# Altium PCB One_Digit_7_Seg_Display.PcbDoc
Units mm, origin at the board's own origin, x right, y up, seen from the top; angles counter-clockwise.
Board outline 46.61 x 34.29 mm, 2 copper layers (Top Layer, Bottom Layer); 21 components, 25 nets, 115 pads, 45 vias.
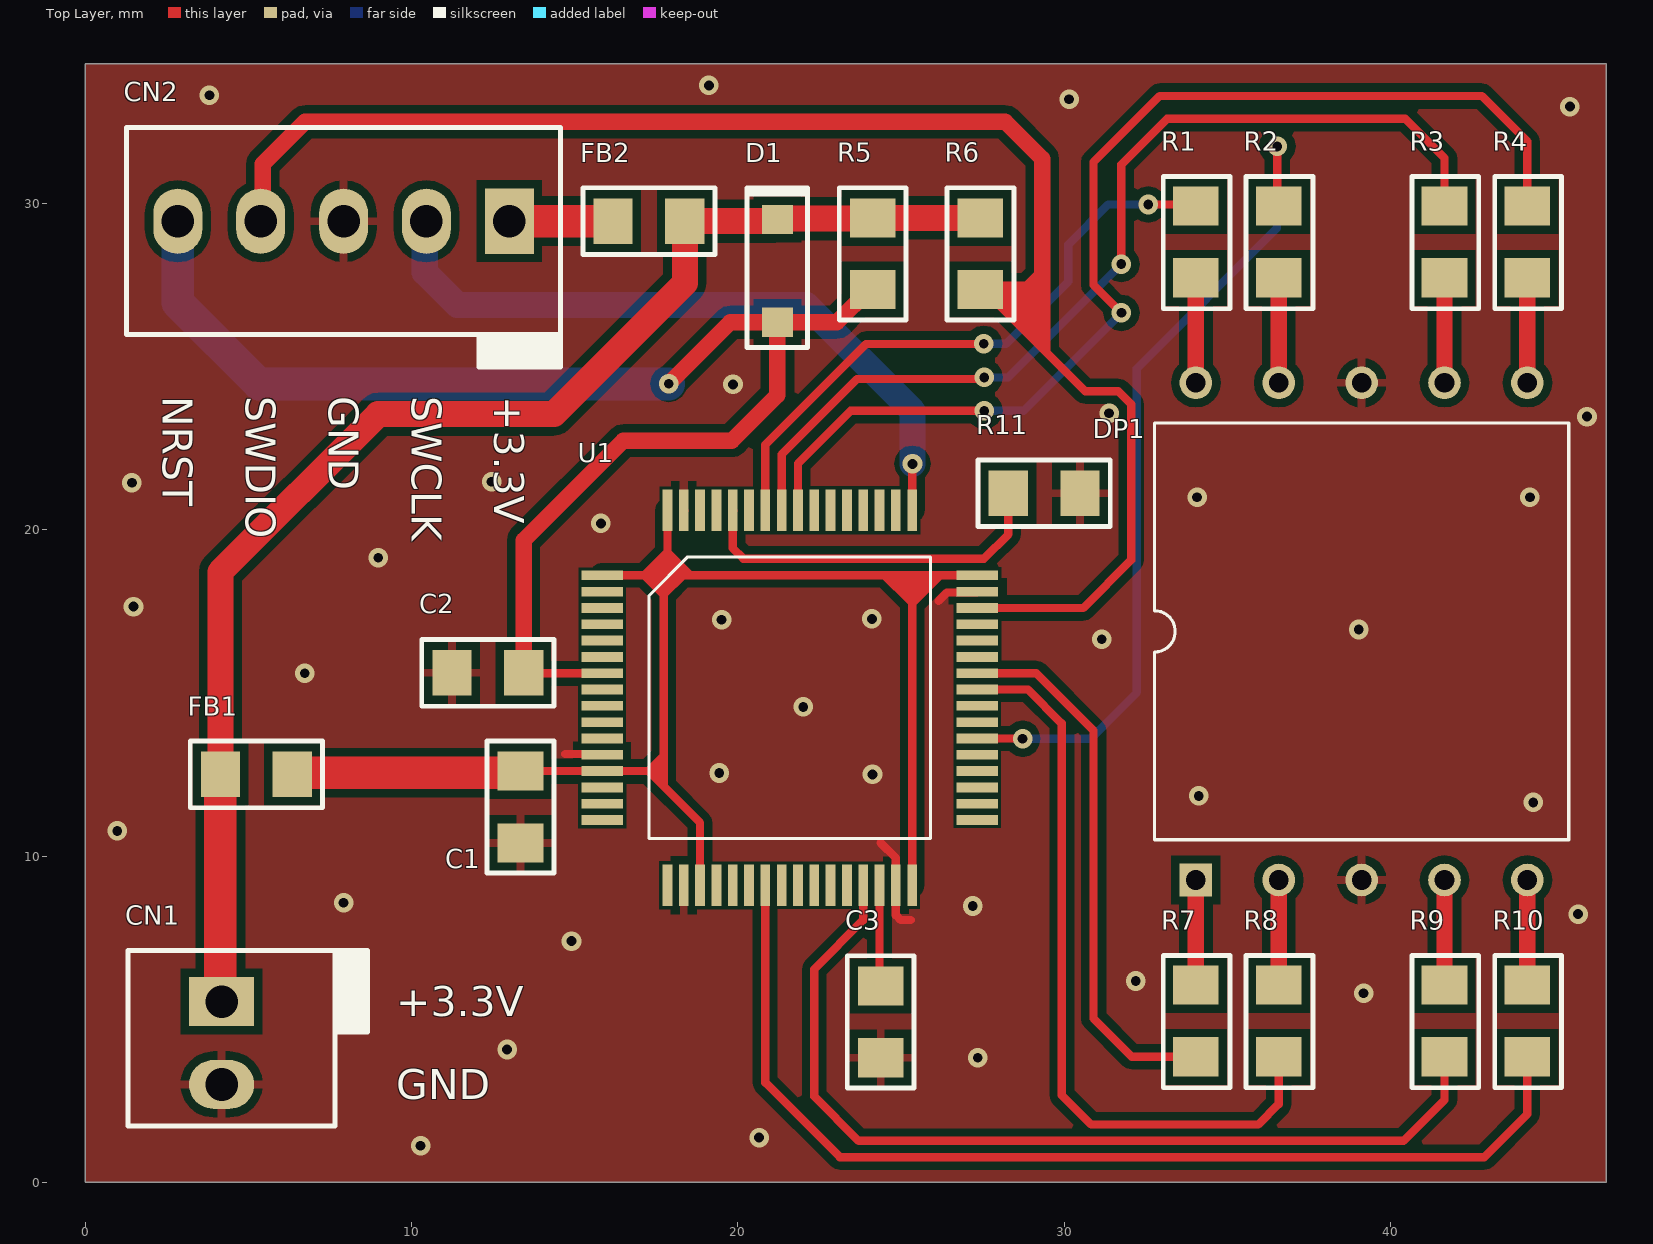
[diagram p0: Top Layer view]
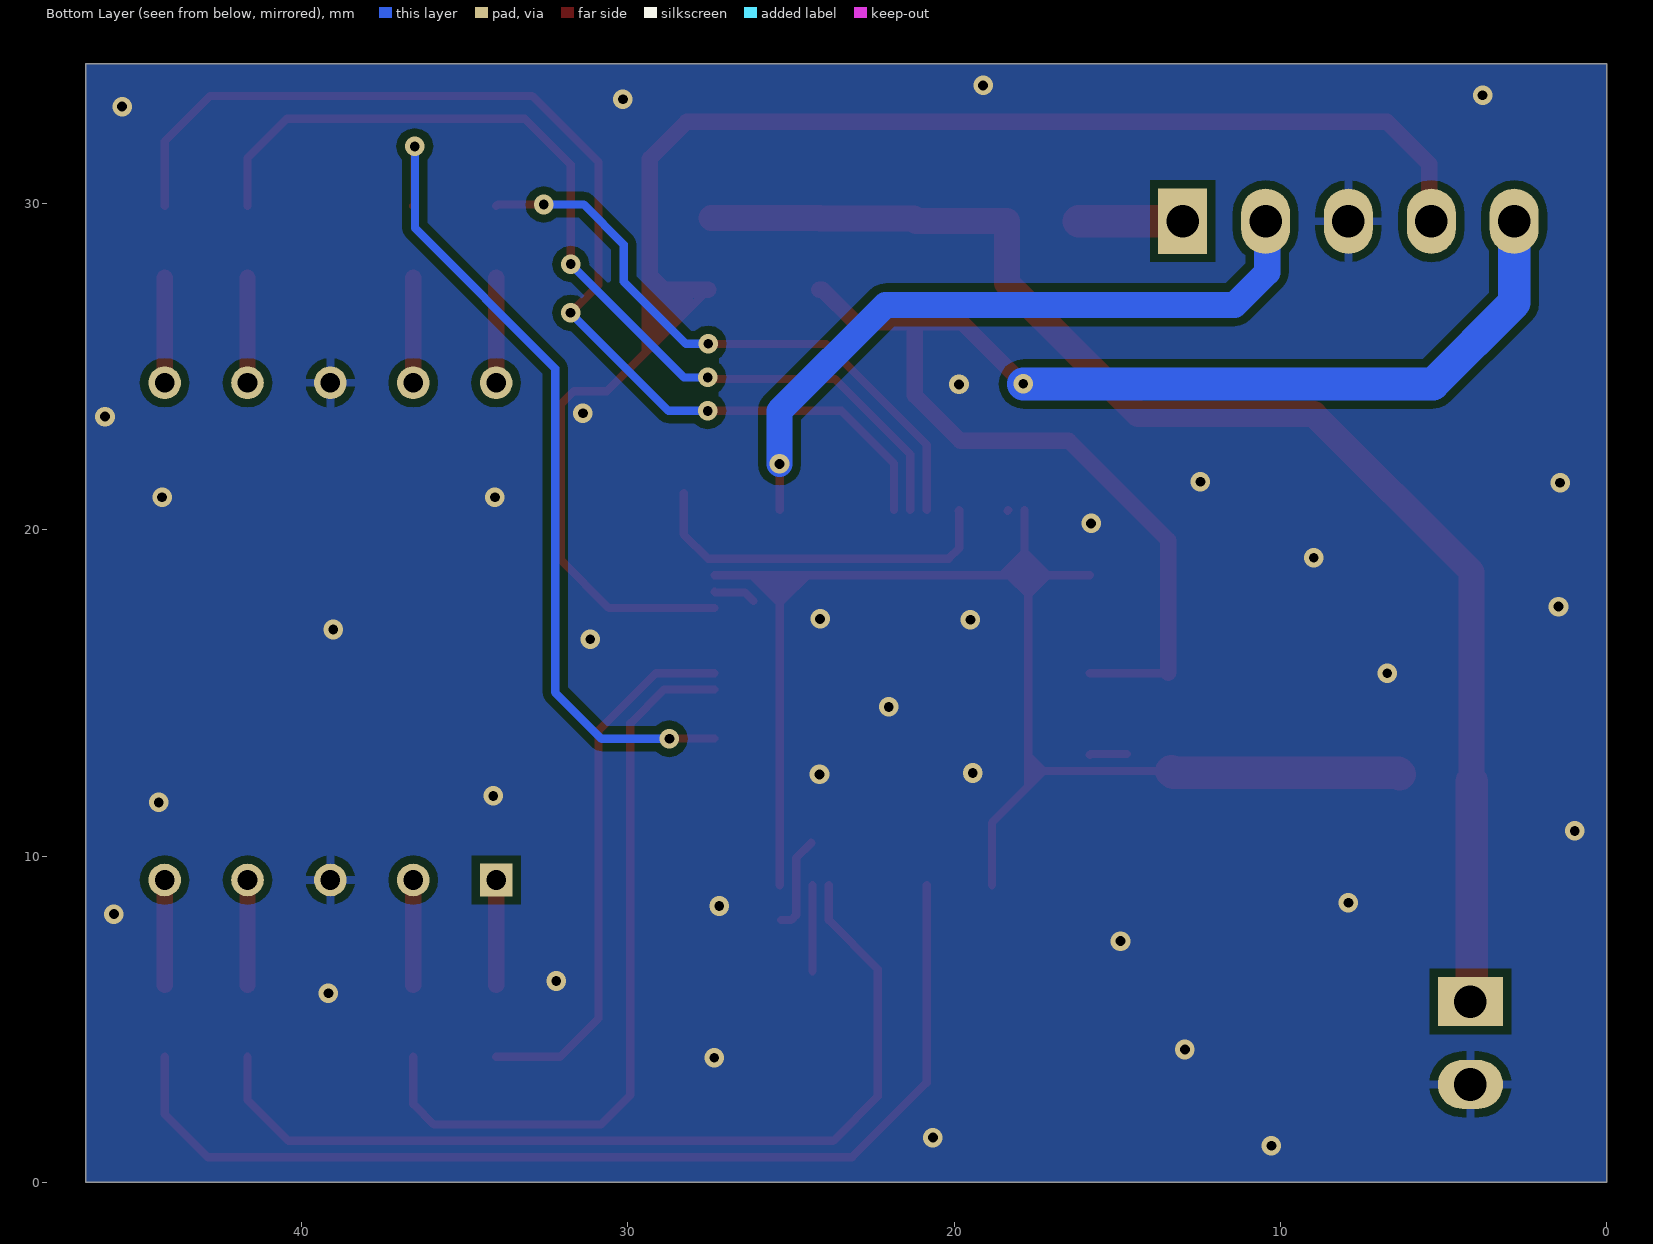
[diagram p1: Bottom Layer view, seen from below]
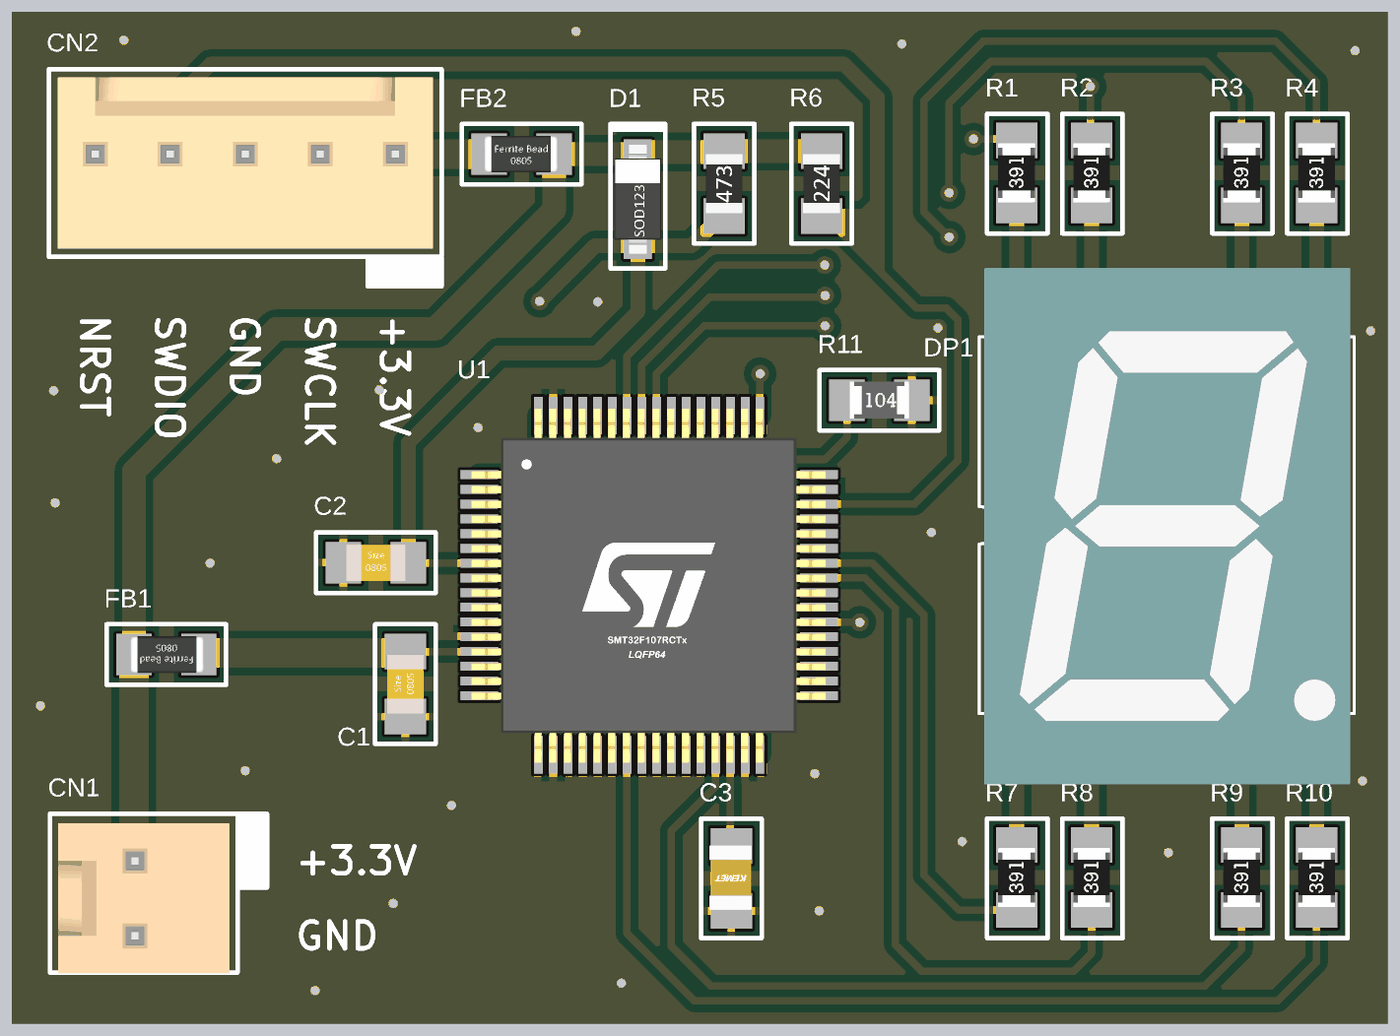
[diagram p2: 3D render of the assembled board from above, using the file's embedded part models]

## Layer stack, top to bottom
Top Solder: solder mask 0.0102, Solder Resist, Dk 3.5
Top Layer: signal copper 0.0356
Dielectric 1: dielectric 0.32, FR-4, Dk 4.8
Bottom Layer: signal copper 0.0356
Bottom Solder: solder mask 0.0102, Solder Resist, Dk 3.5

## Board outline
0,0 0,34.29 46.609,34.29 46.609,0

## Design rules (kind name [scope] priority, off if disabled: settings)
Clearance Clearance_U1 [InComponent('U1')] p1: gap=0.1 ignorepadtopadclearanceinfootprint=FALSE
Clearance [All] p2: gap=0.25 ignorepadtopadclearanceinfootprint=FALSE except(0.2: Arc-Arc Arc-Track Track-Track)
MinimumSolderMaskSliver [All] p1: minsoldermaskwidth=0.1
PlaneConnect [All] p1: planeconnectstyle=Direct reliefexpansion=0.508 reliefentries=4 reliefconductorwidth=0.254 reliefairgap=0.254
PolygonConnect "Connect Via to GND" [(ObjectKind = 'Via') And (Net ='GND')] p1: connectstyle=Direct reliefconductorwidth=0.254 reliefentries=4 polygonreliefangle="90 Angle" airgapwidth=0.254
PolygonConnect [All] p2: connectstyle=Relief reliefconductorwidth=0.254 reliefentries=4 polygonreliefangle="90 Angle" airgapwidth=0.254
RoutingVias [All] p1: holewidth=0.3 width=0.7 viastyle="Through Hole" minholewidth=0.3 minwidth=0.7 maxholewidth=0.3 maxwidth=0.7
SilkToSolderMaskClearance [IsPad] p1: minsilkscreentomaskgap=0.2 clearancetoexposedcopper=TRUE
SolderMaskExpansion [All] p1: expansion=0.102
Width [All] p1: maxlimit=1 minlimit=0.254 preferedwidth=0.3
27 further rules are at their usual default settings.

## Components (designator, comment, footprint, x,y, rotation, side; value= is the part's Value field where it differs from the comment)
C1 "100uF/50V" "CAPACITOR 0805" 13.335,11.509 r90 top
C2 "10nF/50V" "CAPACITOR 0805" 12.335,15.621 r0 top
C3 "4.7uF/16V" "CAPACITOR 0805 4.7UF" 24.375,4.925 r90 top
CN1 "PCMC2-02 - Alimentação +3V3" "HEADER MALE HORIZONTAL 2X1" 4.175,4.275 r90 top
CN2 "PCMC2-05 - Gravacao STM32" "HEADER MACHO HORIZONTAL 5X1 - GRAVACAO STM32" 7.913,29.464 r0 top
D1 "1N4148W-TP" SOD123 21.209,27.94 r90 top
DP1 "TDSG5160" TDSG5160 31.111,22.871 r0 top
FB1 "1A" "FERRITE 0805" 5.238,12.509 r180 top
FB2 "1A" "FERRITE 0805" 17.272,29.465 r0 top
R1 "390R" "RESISTOR 0805 390R" 34.036,28.829 r90 top
R2 "390R" "RESISTOR 0805 390R" 36.576,28.829 r90 top
R3 "390R" "RESISTOR 0805 390R" 41.656,28.829 r90 top
R4 "390R" "RESISTOR 0805 390R" 44.196,28.829 r90 top
R5 "47K" "RESISTOR 0805 47K" 24.13,28.465 r90 top
R6 "220k" "RESISTOR 0805 220K" 27.432,28.465 r90 top
R7 "390R" "RESISTOR 0805 390R" 34.036,4.953 r90 top
R8 "390R" "RESISTOR 0805 390R" 36.576,4.953 r90 top
R9 "390R" "RESISTOR 0805 390R" 41.656,4.953 r90 top
R10 "390R" "RESISTOR 0805 390R" 44.196,4.953 r90 top
R11 "100k" "RESISTOR 0805 100K" 29.413,21.125 r0 top
U1 "STM32F411RET6" LQFP64 21.59,14.859 r0 top

## Footprints (in the part's own frame and the unit in brackets; to place one, negate y for a bottom-side part, rotate by r counter-clockwise, add the part's x,y. Pads: shape width x height; smd on the part's side, far side on the other; paste and mask are expansions set on the pad)
"CAPACITOR 0805" [mm]
  rect 1.2x1.4 smd: 1(-1.1,0) 2(1.1,0)
  silkscreen extent -2.02,-1.02 2.02,1.02, body extent -1,-0.62 1,0.63, height 0.6
"CAPACITOR 0805 4.7UF" [mm]
  rect 1.2x1.4 smd: 1(-1.1,0) 2(1.1,0)
  silkscreen extent -2.02,-1.03 2.03,1.02, body extent -1.07,-0.7 1.13,0.75, height 1.4
"FERRITE 0805" [mm]
  rect 1.2x1.4 smd: 1(-1.1,0) 2(1.1,0)
  silkscreen extent -2.02,-1.02 2.02,1.02, body extent -1.28,-0.62 1.23,0.63, height 0.8
"HEADER MACHO HORIZONTAL 5X1 - GRAVACAO STM32" [mm] "Header Macho Horizontal 5x1 - Gravacao STM32"
  rect 1.5x2 hole 1: 1(5.08,0)
  oval 1.5x2 hole 1: 2(2.54,0) 3(0,0) 4(-2.54,0) 5(-5.08,0)
  silkscreen extent -6.65,-4.48 6.65,2.87, body extent -6.35,-3.2 6.35,2.6, height 11.53
"HEADER MALE HORIZONTAL 2X1" [mm]
  rect 1.5x2 hole 1: 1(1.27,0)
  oval 1.5x2 hole 1: 2(-1.27,0)
  silkscreen extent -2.54,-4.48 2.84,2.87, body extent -2.57,-3.2 2.51,2.6, height 11.6
LQFP64 [mm]
  rect 1.276x0.3 smd: 1(-5.75,3.75) 2(-5.75,3.25) 3(-5.75,2.75) 4(-5.75,2.25) 5(-5.75,1.75) 6(-5.75,1.25) 7(-5.75,0.75) 8(-5.75,0.25) 9(-5.75,-0.25) 10(-5.75,-0.75) 11(-5.75,-1.25) 12(-5.75,-1.75) 13(-5.75,-2.25) 14(-5.75,-2.75) 15(-5.75,-3.25) 16(-5.75,-3.75) 33(5.75,-3.75) 34(5.75,-3.25) 35(5.75,-2.75) 36(5.75,-2.25) 37(5.75,-1.75) 38(5.75,-1.25) 39(5.75,-0.75) 40(5.75,-0.25) 41(5.75,0.25) 42(5.75,0.75) 43(5.75,1.25) 44(5.75,1.75) 45(5.75,2.25) 46(5.75,2.75) 47(5.75,3.25) 48(5.75,3.75)
  rect 0.3x1.276 smd: 17(-3.75,-5.75) 18(-3.25,-5.75) 19(-2.75,-5.75) 20(-2.25,-5.75) 21(-1.75,-5.75) 22(-1.25,-5.75) 23(-0.75,-5.75) 24(-0.25,-5.75) 25(0.25,-5.75) 26(0.75,-5.75) 27(1.25,-5.75) 28(1.75,-5.75) 29(2.25,-5.75) 30(2.75,-5.75) 31(3.25,-5.75) 32(3.75,-5.75) 49(3.75,5.75) 50(3.25,5.75) 51(2.75,5.75) 52(2.25,5.75) 53(1.75,5.75) 54(1.25,5.75) 55(0.75,5.75) 56(0.25,5.75) 57(-0.25,5.75) 58(-0.75,5.75) 59(-1.25,5.75) 60(-1.75,5.75) 61(-2.25,5.75) 62(-2.75,5.75) 63(-3.25,5.75) 64(-3.75,5.75)
  silkscreen extent -4.31,-4.31 4.31,4.31, body extent -6.01,-6.01 5.99,5.99, height 8.6
"RESISTOR 0805 47K" [mm]
  rect 1.2x1.4 smd: 1(-1.1,0) 2(1.1,0)
  silkscreen extent -2.02,-1.02 2.02,1.02, body extent -1,-0.62 1,0.63, height 0.51
"RESISTOR 0805 100K" [mm]
  rect 1.2x1.4 smd: 1(-1.125,0) 2(1.075,0)
  silkscreen extent -2.05,-1.02 2,1.03, body extent -1.03,-0.62 0.97,0.63, height 0.61
"RESISTOR 0805 220K" [mm]
  rect 1.2x1.4 smd: 1(-1.1,0) 2(1.1,0)
  silkscreen extent -2.02,-1.02 2.02,1.02, body extent -1,-0.62 1,0.63, height 0.51
"RESISTOR 0805 390R" [mm]
  rect 1.2x1.4 smd: 1(-1.1,0) 2(1.1,0)
  silkscreen extent -2.05,-1.05 2,1, body extent -1,-0.62 1,0.63, height 0.61
SOD123 [mm]
  rect 0.9x0.95 smd: 1(-1.575,0) 2(1.575,0)
  silkscreen extent -2.35,-0.95 2.6,0.95, body extent -1.85,-0.8 1.85,0.8, height 1.28
TDSG5160 [mm]
  rect 1x1 hole 0.6: 1(2.925,-13.6)
  round 1 hole 0.6: 2(5.465,-13.6) 3(8.005,-13.6) 4(10.545,-13.6) 5(13.085,-13.6) 6(13.085,1.64) 7(10.545,1.64) 8(8.005,1.64) 9(5.465,1.64) 10(2.925,1.64)
  silkscreen extent 1.66,-12.36 14.36,0.41, body extent 1.83,-14.76 14.23,2.74, height 6.48

## Part data
C1: library part CC0805MRX7R9BB104, "Cap Ceramic 0.1uF 50V X7R 20% SMD 0805 125C Paper T/R", Capacitance=100nF, Case/Package=0805, Dielectric=X7R, Manufacturer=Yageo, Max Operating Temperature=125°C, Min Operating Temperature=-55°C, Supplier Part Number 1=311-4351-1-ND, Tolerance=20%, Voltage Rating=50V, ComponentLink1Description=https://datasheet.ciiva.com/13207/upy-gphc-x7r-6-3v-to-50v-8-12304-13207535.pdf?src-supplier=Mouser, ComponentLink1URL=https://datasheet.ciiva.com/13207/upy-gphc-x7r-6-3v-to-50v-8-12304-13207535.pdf?src-supplier=Mouser, Depth=1.25mm, Halogen Free="Halogen Free", Lead Free="Lead Free", Length=0.079inch, Manufacturer Part Number=CC0805MRX7R9BB104, Mount="Surface Mount", Packaging="Tape and Reel", Pricing 1="1 = 0,16000, 10 = 0,11400, 50 = 0,06460, 100 = 0,05350, 500 = 0,03754, 1000 = 0,03108 (USD)", RoHS=Yes, Stock 1=3755, Supplier 1=Digi-Key, Thickness=0.037inch, Voltage Rating (DC)=50V, Width=0.049inch
C2: library part C0805X103F5GEC7210, "Cap Cer 0805 10NF 50V C0G 1%", Manufacturer=KEMET, Supplier Part Number 1=C0805X103F5GEC7210-ND, Manufacturer Part Number=C0805X103F5GEC7210, Pricing 1="10000 = 0,10290 (USD)", Stock 1=0, Supplier 1=Digi-Key
C3: library part C0805C475M4PACTU, "Multilayer Ceramic Capacitors MLCC - SMD/SMT 16volts 4.7uF X5R 20%", Capacitance=4.7uF, Case/Package=0805, Case Code (Metric)=2012, Dielectric=X5R, Dielectric Material=Ceramic, Manufacturer=KEMET, Max Operating Temperature=85°C, Min Operating Temperature=-55°C, Package Quantity=1, Supplier Part Number 1=399-9249-1-ND, Tolerance=20%, Voltage Rating=16V, Case Code (Imperial)=0805, ComponentLink1Description=http://components.arrow.com/part/dataview/40912695S6999520N7429?src-supplier=Arrow, ComponentLink1URL=http://components.arrow.com/part/dataview/40912695S6999520N7429?src-supplier=Arrow, ComponentLink2Description=http://www.mouser.com/ds/2/212/KEM_C1006_X5R_SMD-1103249.pdf?src-supplier=Mouser, ComponentLink2URL=http://www.mouser.com/ds/2/212/KEM_C1006_X5R_SMD-1103249.pdf?src-supplier=Mouser, ComponentLink3Description=https://search.kemet.com/component-edge/download/datasheet/C0805C475M4PACTU.pdf?src-supplier=Digi-Key, ComponentLink3URL=https://search.kemet.com/component-edge/download/datasheet/C0805C475M4PACTU.pdf?src-supplier=Digi-Key, ComponentLink4Description=https://api.kemet.com/component-edge/download/datasheet/C0805C475M4PACTU.pdf?src-supplier=Digi-Key, ComponentLink4URL=https://api.kemet.com/component-edge/download/datasheet/C0805C475M4PACTU.pdf?src-supplier=Digi-Key, Depth=1.25mm, Dissipation Factor=5%, Height=1.25mm, Lead Free="Lead Free", Lead Pitch=0.75mm, Length=2mm, Manufacturer Part Number=C0805C475M4PACTU, Mount="Surface Mount", Packaging="Tape and Reel", Pricing 1="1 = 0,54000, 10 = 0,37800, 50 = 0,26460, 100 = 0,22690, 500 = 0,17016, 1000 = 0,14369 (USD)", RoHS=Yes, Stock 1=4513, Supplier 1=Digi-Key, Termination=SMD/SMT, Thickness=0.055inch, Voltage Rating (DC)=16V, Width=0.049inch
D1: "MICRO COMMERCIAL COMPONENTS - 1N4148W-TP - SWITCHING DIODE, 150mA, 100V, SOD123, FU", Average Rectified Current=150mA, Capacitance=4pF, Forward Voltage=1V, Manufacturer=MCC, Max Forward Surge Current (Ifsm)=1A, Max Operating Temperature=150°C, Max Repetitive Reverse Voltage (Vrrm)=100V, Max Reverse Leakage Current=5uA, Max Surge Current=2A, Min Operating Temperature=-65°C, Package Quantity=3000, Power Dissipation=400mW, Supplier Part Number 1=1N4148WTPMSCT-ND, ComponentLink1Description=https://datasheet.ciiva.com/16836/1n4148wsod123-16836277.pdf?src-supplier=Future+Electronics, ComponentLink1URL=https://datasheet.ciiva.com/16836/1n4148wsod123-16836277.pdf?src-supplier=Future+Electronics, ComponentLink2Description=https://datasheet.ciiva.com/1243/1684829-1243908.pdf?src-supplier=Newark, ComponentLink2URL=https://datasheet.ciiva.com/1243/1684829-1243908.pdf?src-supplier=Newark, ComponentLink3Description=https://datasheet.ciiva.com/4435/1n4148wsod123-48460-4435223.pdf?src-supplier=Mouser, ComponentLink3URL=https://datasheet.ciiva.com/4435/1n4148wsod123-48460-4435223.pdf?src-supplier=Mouser, ComponentLink4Description=https://datasheet.ciiva.com/911/1n4148wsod123-911676.pdf?src-supplier=Digi-Key, ComponentLink4URL=https://datasheet.ciiva.com/911/1n4148wsod123-911676.pdf?src-supplier=Digi-Key, ComponentLink5Description=https://datasheet.ciiva.com/911/1n4148wsod123-911677.pdf?src-supplier=Digi-Key, ComponentLink5URL=https://datasheet.ciiva.com/911/1n4148wsod123-911677.pdf?src-supplier=Digi-Key, ComponentLink6Description=https://datasheet.ciiva.com/22747/1684829-22747439.pdf?src-supplier=Element14, ComponentLink6URL=https://datasheet.ciiva.com/22747/1684829-22747439.pdf?src-supplier=Element14, ComponentLink7Description=https://datasheet.ciiva.com/14557/70055519-14557767.pdf?src-supplier=Allied+Electronics, ComponentLink7URL=https://datasheet.ciiva.com/14557/70055519-14557767.pdf?src-supplier=Allied+Electronics, ComponentLink8Description=https://datasheet.ciiva.com/7622/1684829-7622556.pdf?src-supplier=Element14, ComponentLink8URL=https://datasheet.ciiva.com/7622/1684829-7622556.pdf?src-supplier=Element14, ComponentLink9Description=https://datasheet.ciiva.com/911/1n4148wsod123-911678.pdf?src-supplier=Digi-Key, ComponentLink9URL=https://datasheet.ciiva.com/911/1n4148wsod123-911678.pdf?src-supplier=Digi-Key, ComponentLink10Description=http://datasheet.octopart.com/1N4148W-TP-Micro-Commercial-datasheet-60845.pdf?src-supplier=Element14, ComponentLink10URL=http://datasheet.octopart.com/1N4148W-TP-Micro-Commercial-datasheet-60845.pdf?src-supplier=Element14, ComponentLink11Description=http://datasheet.octopart.com/1N4148W-TP-Micro-Commercial-datasheet-13551187.pdf?src-supplier=Upverter, ComponentLink11URL=http://datasheet.octopart.com/1N4148W-TP-Micro-Commercial-datasheet-13551187.pdf?src-supplier=Upverter, ComponentLink12Description=http://datasheet.octopart.com/1N4148W-TP-MCC-datasheet-8327246.pdf?src-supplier=Future+Electronics, ComponentLink12URL=http://datasheet.octopart.com/1N4148W-TP-MCC-datasheet-8327246.pdf?src-supplier=Future+Electronics, ComponentLink13Description=http://datasheet.octopart.com/1N4148W-TP-MCC-datasheet-124568.pdf?src-supplier=Future+Electronics, ComponentLink13URL=http://datasheet.octopart.com/1N4148W-TP-MCC-datasheet-124568.pdf?src-supplier=Future+Electronics, ComponentLink14Description=http://datasheet.octopart.com/1N4148W-TP-MCC-datasheet-10003094.pdf?src-supplier=Allied+Electronics, ComponentLink14URL=http://datasheet.octopart.com/1N4148W-TP-MCC-datasheet-10003094.pdf?src-supplier=Allied+Electronics, ComponentLink15Description=http://datasheet.octopart.com/1N4148W-TP-Micro-Commercial-datasheet-11773887.pdf?src-supplier=Arrow, ComponentLink15URL=http://datasheet.octopart.com/1N4148W-TP-Micro-Commercial-datasheet-11773887.pdf?src-supplier=Arrow, ComponentLink16Description=http://datasheet.octopart.com/1N4148W-TP-MCC-datasheet-133511570.pdf?src-supplier=Future+Electronics, ComponentLink16URL=http://datasheet.octopart.com/1N4148W-TP-MCC-datasheet-133511570.pdf?src-supplier=Future+Electronics, ComponentLink17Description=http://datasheet.octopart.com/1N4148W-TP-MCC-datasheet-134792309.pdf?src-supplier=TME, ComponentLink17URL=http://datasheet.octopart.com/1N4148W-TP-MCC-datasheet-134792309.pdf?src-supplier=TME, Current Rating=150mA, Element Configuration=Single, Forward Current=150mA, Height=1.2mm, Lead Free="Lead Free", Length=2.85mm, Manufacturer Part Number=1N4148W-TP, Max Reverse Voltage (DC)=100V, Mount="Surface Mount", Number of Pins=2, Output Current=150mA, Packaging="Tape and Reel", Peak Non-Repetitive Surge Current=2A, Polarity=Standard, Pricing 1="1 = 0,17000, 10 = 0,15800, 25 = 0,15000, 100 = 0,06600, 250 = 0,06336, 500 = 0,05184, 1000 = 0,03600 (USD)", Radiation Hardening=No, REACH SVHC=Unknown, Recovery Time=4ns, Reverse Recovery Time=4ns, Stock 1=11901, Supplier 1=Digi-Key, Voltage Rating (DC)=100V, Width=1.8mm
DP1: "Displays Module 1DIGIT 8LED Green CC 10-Pin DIP Module", Case/Package=DIP, Color=Green, Forward Current=25mA, Forward Voltage=2.4V, Manufacturer="Vishay Semiconductors", Max Operating Temperature=85°C, Max Power Dissipation=550mW, Min Operating Temperature=-40°C, Package Quantity=400, Reverse Voltage=15V, Supplier Part Number 1=70061451, Test Current=10mA, Character Height=13mm, Character Width=7.4mm, ComponentLink1Description=https://datasheet.ciiva.com/4263/tdsg11-4263936.pdf?src-supplier=Arrow, ComponentLink1URL=https://datasheet.ciiva.com/4263/tdsg11-4263936.pdf?src-supplier=Arrow, ComponentLink2Description=https://datasheet.ciiva.com/4263/tdsl11-4263299.pdf?src-supplier=Arrow, ComponentLink2URL=https://datasheet.ciiva.com/4263/tdsl11-4263299.pdf?src-supplier=Arrow, ComponentLink3Description=https://datasheet.ciiva.com/11771/0900766b80e30a57-11771290.pdf?src-supplier=RSComponents, ComponentLink3URL=https://datasheet.ciiva.com/11771/0900766b80e30a57-11771290.pdf?src-supplier=RSComponents, ComponentLink4Description=https://datasheet.ciiva.com/15136/getdatasheetpartid-44902-15136383.pdf?src-supplier=Verical, ComponentLink4URL=https://datasheet.ciiva.com/15136/getdatasheetpartid-44902-15136383.pdf?src-supplier=Verical, ComponentLink5Description=https://datasheet.ciiva.com/3208/tdsl51-3208469.pdf?src-supplier=Avnet, ComponentLink5URL=https://datasheet.ciiva.com/3208/tdsl51-3208469.pdf?src-supplier=Avnet, ComponentLink6Description=https://datasheet.ciiva.com/14165/xntdsgoy51-14165399.pdf?src-supplier=Distrelec, ComponentLink6URL=https://datasheet.ciiva.com/14165/xntdsgoy51-14165399.pdf?src-supplier=Distrelec, ComponentLink7Description=https://datasheet.ciiva.com/18549/tdsg51-18549816.pdf?src-supplier=Digi-Key, ComponentLink7URL=https://datasheet.ciiva.com/18549/tdsg51-18549816.pdf?src-supplier=Digi-Key, Depth=17.5mm, Dominant Wavelength=575nm, Element Configuration="Common Cathode", Height=0.689inch, Illumination Color=Green, Length=12.25mm, Luminous Intensity=9.5mcd, Manufacturer Part Number=TDSG5160, Mount="Through Hole,PCB", Number of Characters=1, Number of Elements=8, Number of Pins=10, Number of Positions=1, Number of Segments=7, Operating Supply Voltage=2.4V, Packaging=Bulk, Power Consumption=550mW, Power Dissipation=550mW, Pricing 1="400 = 0,69900 (USD)", Radiation Hardening=No, RoHS=Yes, Stock 1=0, Supplier 1="Allied Electronics", Viewing Angle=50°, Viewing Area (height)=13mm, Wavelength=575nm, Width=0.482inch
FB1 FB2: library part "Bead 1A 0805", "FERRITE BEAD 0805 1LN", Case/Package=0805, DC Resistance (DCR)=300mR, Manufacturer=Fair-Rite, Manufacturer Part Number=2508051027Y1, Max Operating Temperature=125°C, Min Operating Temperature=-55°C, Package Quantity=4000, Supplier Part Number 1=1934-1009-1-ND, Test Frequency=100MHz, Tolerance=25%, ComponentLink1Description=https://datasheet.ciiva.com/3855/9132508051027y1-3855886.pdf?src-supplier=Arrow, ComponentLink1URL=https://datasheet.ciiva.com/3855/9132508051027y1-3855886.pdf?src-supplier=Arrow, Height=0.9mm, Impedance=1kR, Length=2mm, Max DC Current=1A, Packaging="Tape and Reel", Pricing 1="1 = 0,10000, 10 = 0,06100, 25 = 0,05440, 50 = 0,04960, 100 = 0,04460, 250 = 0,03268, 500 = 0,02376, 1000 = 0,02327 (USD)", RoHS=Yes, Stock 1=27360, Supplier 1=Digi-Key, Termination=SMD/SMT, Width=1.25mm
R1 R2 R3 R4 R7 R8 R9 R10: library part RC0805JR-07390RL, "YAGEO (PHYCOMP)   RC0805JR-07390RL   Surface Mount Chip Resistor, Thick Film, RC Series, 390 ohm, 125 mW,  5%, 150 V", Case/Package=0805, Case Code (Metric)=2012, Manufacturer=Yageo, Max Operating Temperature=155°C, Max Power Dissipation=125mW, Min Operating Temperature=-55°C, Package Quantity=1, Supplier Part Number 1=311-390ARCT-ND, Temperature Coefficient=100ppm/°C, Tolerance=5%, Voltage Rating=150V, Case Code (Imperial)=0805, ComponentLink1Description=https://datasheet.ciiva.com/2519/pyu-r-int-thick-7-2519261.pdf?src-supplier=Digi-Key, ComponentLink1URL=https://datasheet.ciiva.com/2519/pyu-r-int-thick-7-2519261.pdf?src-supplier=Digi-Key, ComponentLink2Description=https://datasheet.ciiva.com/2519/pyu-r-int-thick-7-2519262.pdf?src-supplier=Digi-Key, ComponentLink2URL=https://datasheet.ciiva.com/2519/pyu-r-int-thick-7-2519262.pdf?src-supplier=Digi-Key, ComponentLink3Description=https://datasheet.ciiva.com/2519/pyu-r-int-thick-7-2519263.pdf?src-supplier=Digi-Key, ComponentLink3URL=https://datasheet.ciiva.com/2519/pyu-r-int-thick-7-2519263.pdf?src-supplier=Digi-Key, ComponentLink4Description=https://datasheet.ciiva.com/7941/442941-7941951.pdf?src-supplier=Element14, ComponentLink4URL=https://datasheet.ciiva.com/7941/442941-7941951.pdf?src-supplier=Element14, Composition="Thick Film", Contact Plating=Tin,Matte,Lead, Depth=1.25mm, Features="Moisture Resistant", Height=0.024inch, Lead Free="Lead Free", Length=2mm, Manufacturer Part Number=RC0805JR-07390RL, Military Standard=Not, Number of Terminations=2, Packaging="Tape and Reel", Power Rating=125mW, Pricing 1="1 = 0,10000, 10 = 0,03500, 100 = 0,01400, 1000 = 0,00631, 2500 = 0,00548 (USD)", Radiation Hardening=No, REACH SVHC=Unknown, Resistance=390R, RoHS=Yes, Stock 1=479533, Supplier 1=Digi-Key, Termination=SMD/SMT, Width=1.25mm
R5: library part RC0805JR-0747KL, "YAGEO (PHYCOMP)   RC0805JR-0747KL   Surface Mount Chip Resistor, Thick Film, RC Series, 47 kohm, 125 mW,  5%, 150 V", Case/Package=0805, Case Code (Metric)=2012, Manufacturer=Yageo, Max Operating Temperature=155°C, Min Operating Temperature=-55°C, Power Rating=125mW, Resistance=47kR, Supplier Part Number 1=311-47KARCT-ND, Temperature Coefficient=100ppm/°C, Tolerance=5%, Voltage Rating=150V, Case Code (Imperial)=0805, ComponentLink1Description=https://datasheet.ciiva.com/7941/442941-7941967.pdf?src-supplier=Element14, ComponentLink1URL=https://datasheet.ciiva.com/7941/442941-7941967.pdf?src-supplier=Element14, ComponentLink2Description=https://datasheet.ciiva.com/17200/rc0805-17200744.pdf?src-supplier=Future+Electronics, ComponentLink2URL=https://datasheet.ciiva.com/17200/rc0805-17200744.pdf?src-supplier=Future+Electronics, Composition="Thick Film", Contact Plating=Tin,Lead,Matte, Depth=1.25mm, Lead Free="Lead Free", Length=2mm, Manufacturer Part Number=RC0805JR-0747KL, Military Standard=Not, Packaging="Tape and Reel", Pricing 1="1 = 0,10000, 10 = 0,03500, 100 = 0,01400, 1000 = 0,00631, 2500 = 0,00548 (USD)", Radiation Hardening=No, REACH SVHC=Unknown, RoHS=Yes, Stock 1=972470, Supplier 1=Digi-Key, Termination=SMD/SMT
R6: library part RC0805JR-07220KL, "YAGEO - RC0805JR-07220KL - RES, 220K, 5%, 0.125W, 0805, THICK FILM", Case/Package=0805, Case Code (Metric)=2012, Manufacturer=Yageo, Max Operating Temperature=155°C, Max Power Dissipation=125mW, Min Operating Temperature=-55°C, Package Quantity=1, Resistance=220kR, Supplier Part Number 1=311-220KARCT-ND, Temperature Coefficient=100ppm/°C, Tolerance=5%, Voltage Rating=150V, Case Code (Imperial)=0805, ComponentLink1Description=https://datasheet.ciiva.com/5925/442941-5925072.pdf?src-supplier=Farnell, ComponentLink1URL=https://datasheet.ciiva.com/5925/442941-5925072.pdf?src-supplier=Farnell, ComponentLink2Description=https://datasheet.ciiva.com/2456/pyu-r-int-thick-7-2456369.pdf?src-supplier=Digi-Key, ComponentLink2URL=https://datasheet.ciiva.com/2456/pyu-r-int-thick-7-2456369.pdf?src-supplier=Digi-Key, ComponentLink3Description=https://datasheet.ciiva.com/2456/pyu-r-int-thick-7-2456370.pdf?src-supplier=Digi-Key, ComponentLink3URL=https://datasheet.ciiva.com/2456/pyu-r-int-thick-7-2456370.pdf?src-supplier=Digi-Key, ComponentLink4Description=https://datasheet.ciiva.com/2456/pyu-r-int-thick-7-2456371.pdf?src-supplier=Digi-Key, ComponentLink4URL=https://datasheet.ciiva.com/2456/pyu-r-int-thick-7-2456371.pdf?src-supplier=Digi-Key, ComponentLink5Description=https://datasheet.ciiva.com/16741/rc0805-16741415.pdf?src-supplier=Future+Electronics, ComponentLink5URL=https://datasheet.ciiva.com/16741/rc0805-16741415.pdf?src-supplier=Future+Electronics, ComponentLink6Description=https://datasheet.ciiva.com/7941/442941-7941915.pdf?src-supplier=Element14, ComponentLink6URL=https://datasheet.ciiva.com/7941/442941-7941915.pdf?src-supplier=Element14, ComponentLink7Description=https://datasheet.ciiva.com/7941/442941-7941916.pdf?src-supplier=Element14, ComponentLink7URL=https://datasheet.ciiva.com/7941/442941-7941916.pdf?src-supplier=Element14, Composition="Thick Film", Contact Plating=Tin,Matte,Lead, Depth=1.25mm, Features="Moisture Resistant", Height=0.024inch, Lead Free="Lead Free", Length=2mm, Manufacturer Part Number=RC0805JR-07220KL, Military Standard=Not, Number of Terminations=2, Packaging="Tape and Reel", Power Rating=125mW, Pricing 1="1 = 0,10000, 10 = 0,03500, 100 = 0,01400, 1000 = 0,00631, 2500 = 0,00548 (USD)", Radiation Hardening=No, REACH SVHC=Unknown, RoHS=Yes, Stock 1=367499, Supplier 1=Digi-Key, Termination=SMD/SMT, Width=0.049inch, Working Voltage=150V
R11: library part RC0805JR-07100KL, "Res Thick Film 0805 100K Ohm 5% 1/8W 100ppm/C Molded SMD SMD Paper T/R", Case/Package=0805, Case Code (Metric)=2012, Manufacturer=Yageo, Max Operating Temperature=155°C, Min Operating Temperature=-55°C, Power Rating=125mW, Resistance=100kR, Supplier Part Number 1=311-100KARCT-ND, Temperature Coefficient=100ppm/°C, Tolerance=5%, Voltage Rating=150V, Case Code (Imperial)=0805, ComponentLink1Description=https://datasheet.ciiva.com/7941/442941-7941864.pdf?src-supplier=Element14, ComponentLink1URL=https://datasheet.ciiva.com/7941/442941-7941864.pdf?src-supplier=Element14, ComponentLink2Description=https://datasheet.ciiva.com/7941/442941-7941865.pdf?src-supplier=Element14, ComponentLink2URL=https://datasheet.ciiva.com/7941/442941-7941865.pdf?src-supplier=Element14, ComponentLink3Description=https://datasheet.ciiva.com/15190/getdatasheetpartid-479267-15190029.pdf?src-supplier=Verical, ComponentLink3URL=https://datasheet.ciiva.com/15190/getdatasheetpartid-479267-15190029.pdf?src-supplier=Verical, Composition="Thick Film", Contact Plating=Tin,Matte,Lead, Depth=1.25mm, Lead Free="Lead Free", Length=2mm, Manufacturer Part Number=RC0805JR-07100KL, Military Standard=Not, Packaging="Tape and Reel", Pricing 1="1 = 0,10000, 10 = 0,03500, 100 = 0,01400, 1000 = 0,00631, 2500 = 0,00548 (USD)", Radiation Hardening=No, REACH SVHC=Unknown, RoHS=Yes, Stock 1=2684406, Supplier 1=Digi-Key, Termination=SMD/SMT
U1: "IC MCU 32BIT 512KB FLASH 64LQFP", Case/Package=LQFP, Frequency=100MHz, Manufacturer=STMicroelectronics, Max Operating Temperature=85°C, Max Power Dissipation=313mW, Max Supply Voltage=3.6V, Min Operating Temperature=-40°C, Min Supply Voltage=1.7V, Operating Supply Voltage=3.3V, Package Quantity=960, Supplier Part Number 1=497-14909-ND, ComponentLink1Description=http://www.mouser.com/ds/2/389/stm32f411ce-956237.pdf?src-supplier=Mouser, ComponentLink1URL=http://www.mouser.com/ds/2/389/stm32f411ce-956237.pdf?src-supplier=Mouser, ComponentLink2Description=http://www.farnell.com/datasheets/1941006.pdf?src-supplier=Farnell, ComponentLink2URL=http://www.farnell.com/datasheets/1941006.pdf?src-supplier=Farnell, ComponentLink3Description=http://www.st.com/st-web-ui/static/active/en/resource/technical/document/datasheet/DM00115249.pdf?src-supplier=Avnet, ComponentLink3URL=http://www.st.com/st-web-ui/static/active/en/resource/technical/document/datasheet/DM00115249.pdf?src-supplier=Avnet, ComponentLink4Description=http://www.st.com/content/ccc/resource/technical/document/datasheet/b3/a5/46/3b/b4/e5/4c/85/DM00115249.pdf/files/DM00115249.pdf/jcr:content/translations/en.DM00115249.pdf?src-supplier=Digi-Key, ComponentLink4URL=http://www.st.com/content/ccc/resource/technical/document/datasheet/b3/a5/46/3b/b4/e5/4c/85/DM00115249.pdf/files/DM00115249.pdf/jcr:content/translations/en.DM00115249.pdf?src-supplier=Digi-Key, ComponentLink5Description=http://www.farnell.com/datasheets/1941006.pdf?src-supplier=Newark, ComponentLink5URL=http://www.farnell.com/datasheets/1941006.pdf?src-supplier=Newark, ComponentLink6Description=http://www.farnell.com/datasheets/1869644.pdf?src-supplier=Element14, ComponentLink6URL=http://www.farnell.com/datasheets/1869644.pdf?src-supplier=Element14, Core Architecture=ARM, Data Bus Width=32b, Interface=I2C,SPI,USB,IrDA,MMC,SDIO,SD,UART,USART,LIN,I2S, Lead Free="Lead Free", Length=10mm, Manufacturer Part Number=STM32F411RET6, Max Frequency=100MHz, Memory Size=512KB, Memory Type=FLASH, Mount="Surface Mount", Number of ADC Channels=16, Number of I/Os=50, Number of Pins=64, Number of Programmable I/O=50, Number of Timers/Counters=8, Oscillator Type=Internal, Packaging=Tray, Peripherals="Brown-out Detect/Reset,POR,PWM,WDT,DMA", Pricing 1="1 = 6,81000, 10 = 6,15600, 25 = 5,87000, 100 = 5,09690, 250 = 4,86780, 500 = 4,43828, 1000 = 3,86559, 2500 = 3,72242, 5000 = 3,57925 (USD)", Radiation Hardening=No, RAM Size=128KB, REACH SVHC="No SVHC", RoHS=Yes, Stock 1=5414, Supplier 1=Digi-Key, Watchdog Timer=Yes, Weight=0.012088oz, Width=10mm

## Via types
v1: diameter 0.6, hole 0.3, Top Layer to Bottom Layer, tented both sides, 45 vias

## Nets (pads, with @x,y where several pads share a name; then routed paths per layer and width w, separated by ;. In a path a pad name is that pad's centre, name@x,y a point inside that pad or via, vN(x,y) a via of type N, cw(c..) or ccw(c..) an arc to the next point about the centre after c; other vN are vias at no path point)
+3V3: CN1.1 D1.2 FB1.2 FB2.2 R5.2 R6.2 | length 42.1
  Top Layer w0.8: FB1.2@4.138,12.303 FB1.2 4.138,18.713 8.975,23.55 14.357,23.55 18.372,27.565 FB2.2 21.159,29.465 D1.2 21.234,29.54 24.105,29.54 R5.2 R6.2
  Top Layer w1: CN1.1@4.138,5.545 FB1.2@4.138,12.303
DP: R10.1 U1.23 | length 32.7
  Top Layer w0.254: U1.23 20.84,3.06 23.125,0.775 42.875,0.775 44.196,2.096 R10.1
GND: C1.1 C2.1 C3.1 CN1.2 CN2.3 DP1.3 DP1.8 R11.2 U1.12 U1.18 U1.31 U1.47 U1.63 | length 5.4
  Top Layer w0.254: 14.707,13.132 15.817,13.132 U1.12 ; U1.63 U1.63@18.363,20.586 ; 24.378,10.409 24.84,9.947 U1.31 24.84,8.193 24.989,8.044 25.298,8.044 ; 26.15,17.825 26.411,18.086 27.317,18.086 U1.47
  other v1: 10.275,1.125 20.65,1.375 27.35,3.825 12.925,4.075 39.175,5.8 32.191,6.175 14.9,7.4 45.75,8.225 27.2,8.475 7.913,8.575 0.975,10.775 44.375,11.65 34.125,11.85 24.125,12.509 19.425,12.55 22,14.575 6.725,15.609 31.15,16.65 39.025,16.95 19.5,17.25 24.105,17.275 1.475,17.65 8.975,19.15 15.8,20.2 34.075,21 44.275,21 1.425,21.45 12.45,21.475 46.025,23.475 31.375,23.575 19.85,24.46 45.5,32.975 30.15,33.2 3.8,33.325 19.112,33.625
NetC3_2: C3.2 U1.30 | length 2.6
  Top Layer w0.254: C3.2@24.34,6.475 U1.30
NetCN2_1: CN2.1 FB2.1 | length 3.2
  Top Layer w1: CN2.1@12.993,29.465 FB2.1
NetDP1_1: DP1.1 R7.2 | length 3.2
  Top Layer w0.5: R7.2 DP1.1
NetDP1_2: DP1.2 R8.2 | length 3.2
  Top Layer w0.5: R8.2 DP1.2
NetDP1_4: DP1.4 R9.2 | length 3.2
  Top Layer w0.5: R9.2 DP1.4
NetDP1_5: DP1.5 R10.2 | length 3.2
  Top Layer w0.5: R10.2 DP1.5
NetDP1_6: DP1.6 R4.1 | length 3.2
  Top Layer w0.5: DP1.6 R4.1
NetDP1_7: DP1.7 R3.1 | length 3.2
  Top Layer w0.5: DP1.7 R3.1
NetDP1_9: DP1.9 R2.1 | length 3.2
  Top Layer w0.5: DP1.9 R2.1
NetDP1_10: DP1.10 R1.1 | length 3.2
  Top Layer w0.5: DP1.10 R1.1
NetR11_1: R11.1 U1.60 | length 11.3
  Top Layer w0.254: U1.60@19.84,20.586 19.84,19.447 20.167,19.12 27.541,19.12 28.287,19.867 R11.1 ; U1.60 U1.60@19.863,20.586
NRST: C2.2 CN2.5 D1.1 R5.1 U1.7 | length 44.4
  Top Layer w0.254: C2.2@13.419,15.621 13.431,15.609 U1.7
  Top Layer w0.5: C2.2 13.435,19.687 16.481,22.733 19.812,22.733 21.209,24.13 D1.1 ; v1(17.88,24.48) 19.765,26.365 D1.1 ; R5.1 24.03,27.365 23.03,26.365 D1.1
  Bottom Layer w1: CN2.5 2.833,26.964 5.322,24.475 v1@17.875,24.475
SEG_A: R3.2 U1.57 | length 30
  Top Layer w0.254: U1.57 21.34,22.315 23.65,24.625 27.3,24.625 v1@27.45,24.775 ; v1(31.75,28.15) 31.75,31.2 33.15,32.6 40.456,32.6 41.656,31.4 R3.2
  Bottom Layer w0.254: v1(27.55,24.675) 28.275,24.675 v1(31.75,28.15)
SEG_B: R4.2 U1.56 | length 34.9
  Top Layer w0.254: U1.56 21.84,22.04 23.45,23.65 v1(27.55,23.65) ; v1(31.755,26.655) 30.9,27.51 30.9,31.275 32.925,33.3 42.8,33.3 44.196,31.904 R4.2
  Bottom Layer w0.254: v1(27.55,23.65) 28.75,23.65 v1@31.75,26.65
SEG_C: R9.1 U1.29 | length 28.8
  Top Layer w0.254: U1.29 23.84,8.04 22.34,6.54 22.34,2.635 23.7,1.275 40.4,1.275 41.656,2.531 R9.1
SEG_D: R8.1 U1.41 | length 23.1
  Top Layer w0.254: U1.41 28.891,15.109 29.925,14.075 29.925,2.675 30.825,1.775 35.95,1.775 36.576,2.401 R8.1
SEG_E: R7.1 U1.42 | length 16.7
  Top Layer w0.254: U1.42 29.141,15.609 30.9,13.85 30.9,5.025 32.072,3.853 R7.1
SEG_F: R2.2 U1.38 | length 25.7
  Top Layer w0.254: U1.38 v1@28.58,13.609 ; v1(36.53,31.755) 36.53,29.975 R2.2
  Bottom Layer w0.254: v1(28.725,13.6) 30.8,13.6 32.225,15.025 32.225,24.95 36.525,29.25 36.525,31.75 v1(36.53,31.755)
SEG_G: R1.2 U1.58 | length 18.9
  Top Layer w0.254: U1.58 20.84,22.615 23.925,25.7 v1@27.532,25.7 ; v1(32.575,29.975) 33.99,29.975 R1.2
  Bottom Layer w0.254: v1(27.537,25.705) 28.218,25.705 30.125,27.612 30.125,28.75 31.35,29.975 v1(32.575,29.975)
SWCLK: CN2.2 U1.49 | length 21.4
  Top Layer w0.254: U1.49 25.345,20.614 25.345,22.02 v1(25.35,22.025)
  Bottom Layer w0.8: CN2.2@10.5,29.511 CN2.2 10.4,29.411 10.4,27.9 11.4,26.9 22.1,26.9 25.35,23.65 v1(25.35,22.025)
SWDIO: CN2.4 R6.1 U1.46 | length 48.4
  Top Layer w0.254: U1.46 30.584,17.609 32.052,19.077 32.052,23.855 31.655,24.252 30.645,24.252 28.005,26.892 27.532,27.365 R6.1
  Top Layer w0.5: CN2.4 5.433,29.524 5.433,31.214 6.731,32.512 28.194,32.512 29.325,31.381 29.325,27.801 28.889,27.365 R6.1@27.532,27.365
VDD: C1.2 FB1.1 U1.1 U1.13 U1.19 U1.32 U1.48 U1.64 | length 44.9
  Top Layer w0.254: C1.2 U1.13 17.259,12.609 ; U1.1 17.141,18.609 ; U1.64 17.84,19.308 17.141,18.609 ; U1.19 18.84,11.028 17.259,12.609 ; U1.32 25.34,17.749 26.2,18.609 ; U1.48 26.2,18.609 ; 17.141,18.609 17.725,18.025 ; 17.259,12.609 17.725,13.075 17.725,18.025 ; 17.725,18.025 18.309,18.609 26.2,18.609
  Top Layer w1: FB1.1 6.388,12.559 13.285,12.559 C1.2
pads on no net: U1.2 U1.3 U1.4 U1.5 U1.6 U1.8 U1.9 U1.10 U1.11 U1.14 U1.15 U1.16 U1.17 U1.20 U1.21 U1.22 U1.24 U1.25 U1.26 U1.27 U1.28 U1.33 U1.34 U1.35 U1.36 U1.37 U1.39 U1.40 U1.43 U1.44 U1.45 U1.50 U1.51 U1.52 U1.53 U1.54 U1.55 U1.59 U1.61 U1.62

## Polygon pours and split planes (outlines as drawn)
GND on Bottom Layer "Bottom Layer-GND" (solid, remove dead copper, pour order 2): 0,34.3 46.625,34.3 46.625,0 0,0
GND on Top Layer "Top Layer-GND" (solid, pour order 4): 0,34.3 46.625,34.3 46.625,0 0,0

## Other copper
Top Layer:
  region net SWDIO: 29.575,28.051 29.575,25.222 28.005,26.792 28.005,27.425 28.949,27.425
  region net GND: 29.08,25.174
  region net SWDIO: 28.005,26.892
  region net VDD: 26.2,18.609 25.261,17.669 24.33,18.6
  region net VDD: 17.259,12.609 17.85,13.2 17.85,12.036
  region net VDD: 17.05,18.7 17.835,19.485 18.711,18.609 18.309,18.609 17.725,18.025

## Silkscreen, mask and mechanical layers (free items; w line width, h text height)
Mechanical 1:
  the board outline again, w0.2

## Text inside footprints (layer, text, board x,y; h text height)
CN1: Top Overlay "GND" at 9.534,2.548 h0.91; Top Overlay "+3.3V" at 9.534,5.088 h0.91
CN2: Top Overlay "GND" at 7.456,24.105 h0.91 r270; Top Overlay "NRST" at 2.376,24.105 h0.91 r270; Top Overlay "SWDIO" at 4.916,24.105 h0.91 r270; Top Overlay "SWCLK" at 9.996,24.105 h0.91 r270; Top Overlay "+3.3V" at 12.536,24.105 h0.91 r270